# Altium PCB light_controller.PcbDoc
Units mil, origin at the board's own origin, x right, y up, seen from the top; angles counter-clockwise.
Board outline 1400 x 1400 mil, 4 copper layers (Top Layer, Int1 (GND), Int2 (PWR), Bottom Layer), stack 53.911 mil thick; 51 components, 34 nets, 142 pads, 43 vias.
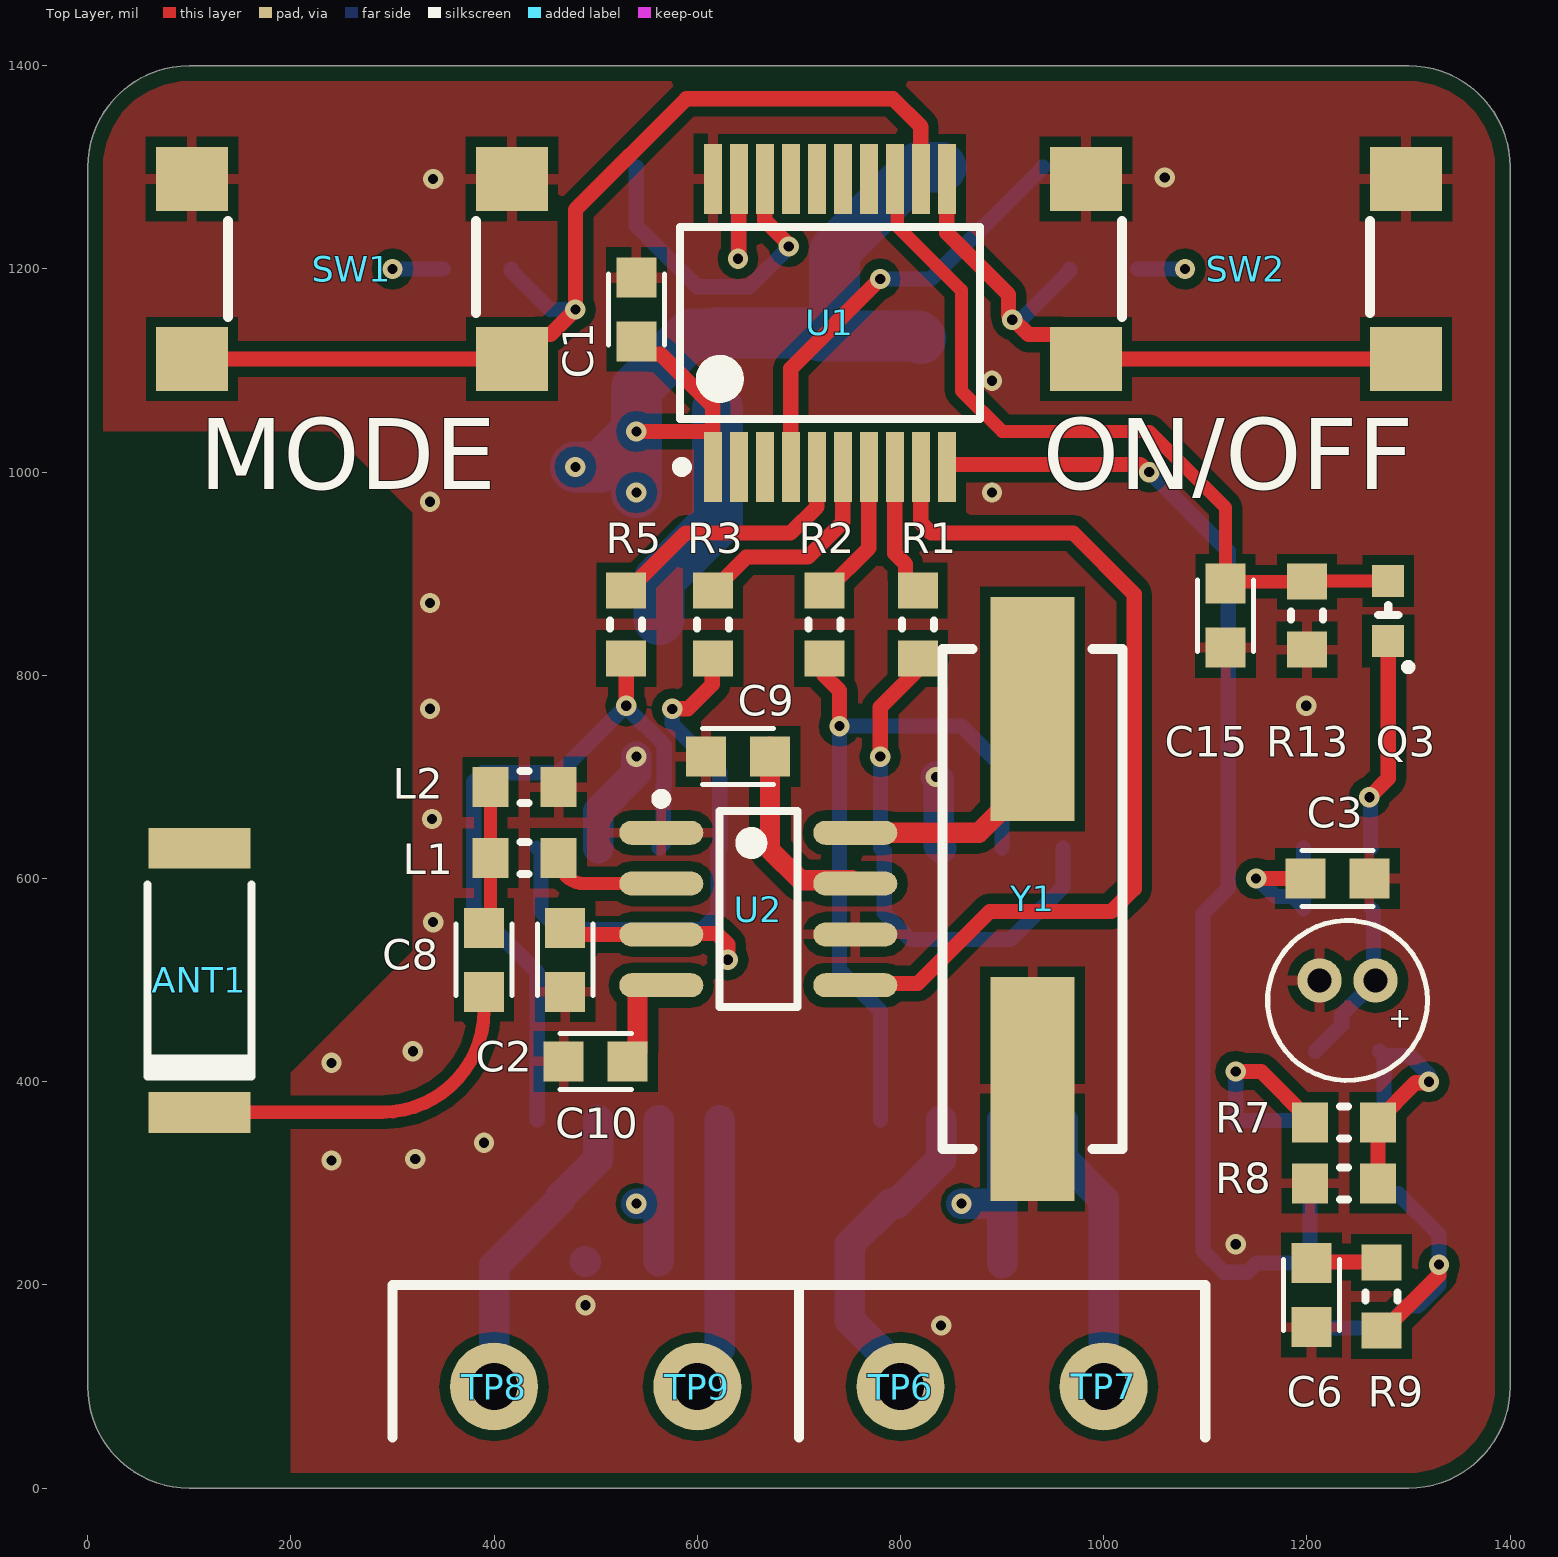
[diagram p0: Top Layer view]
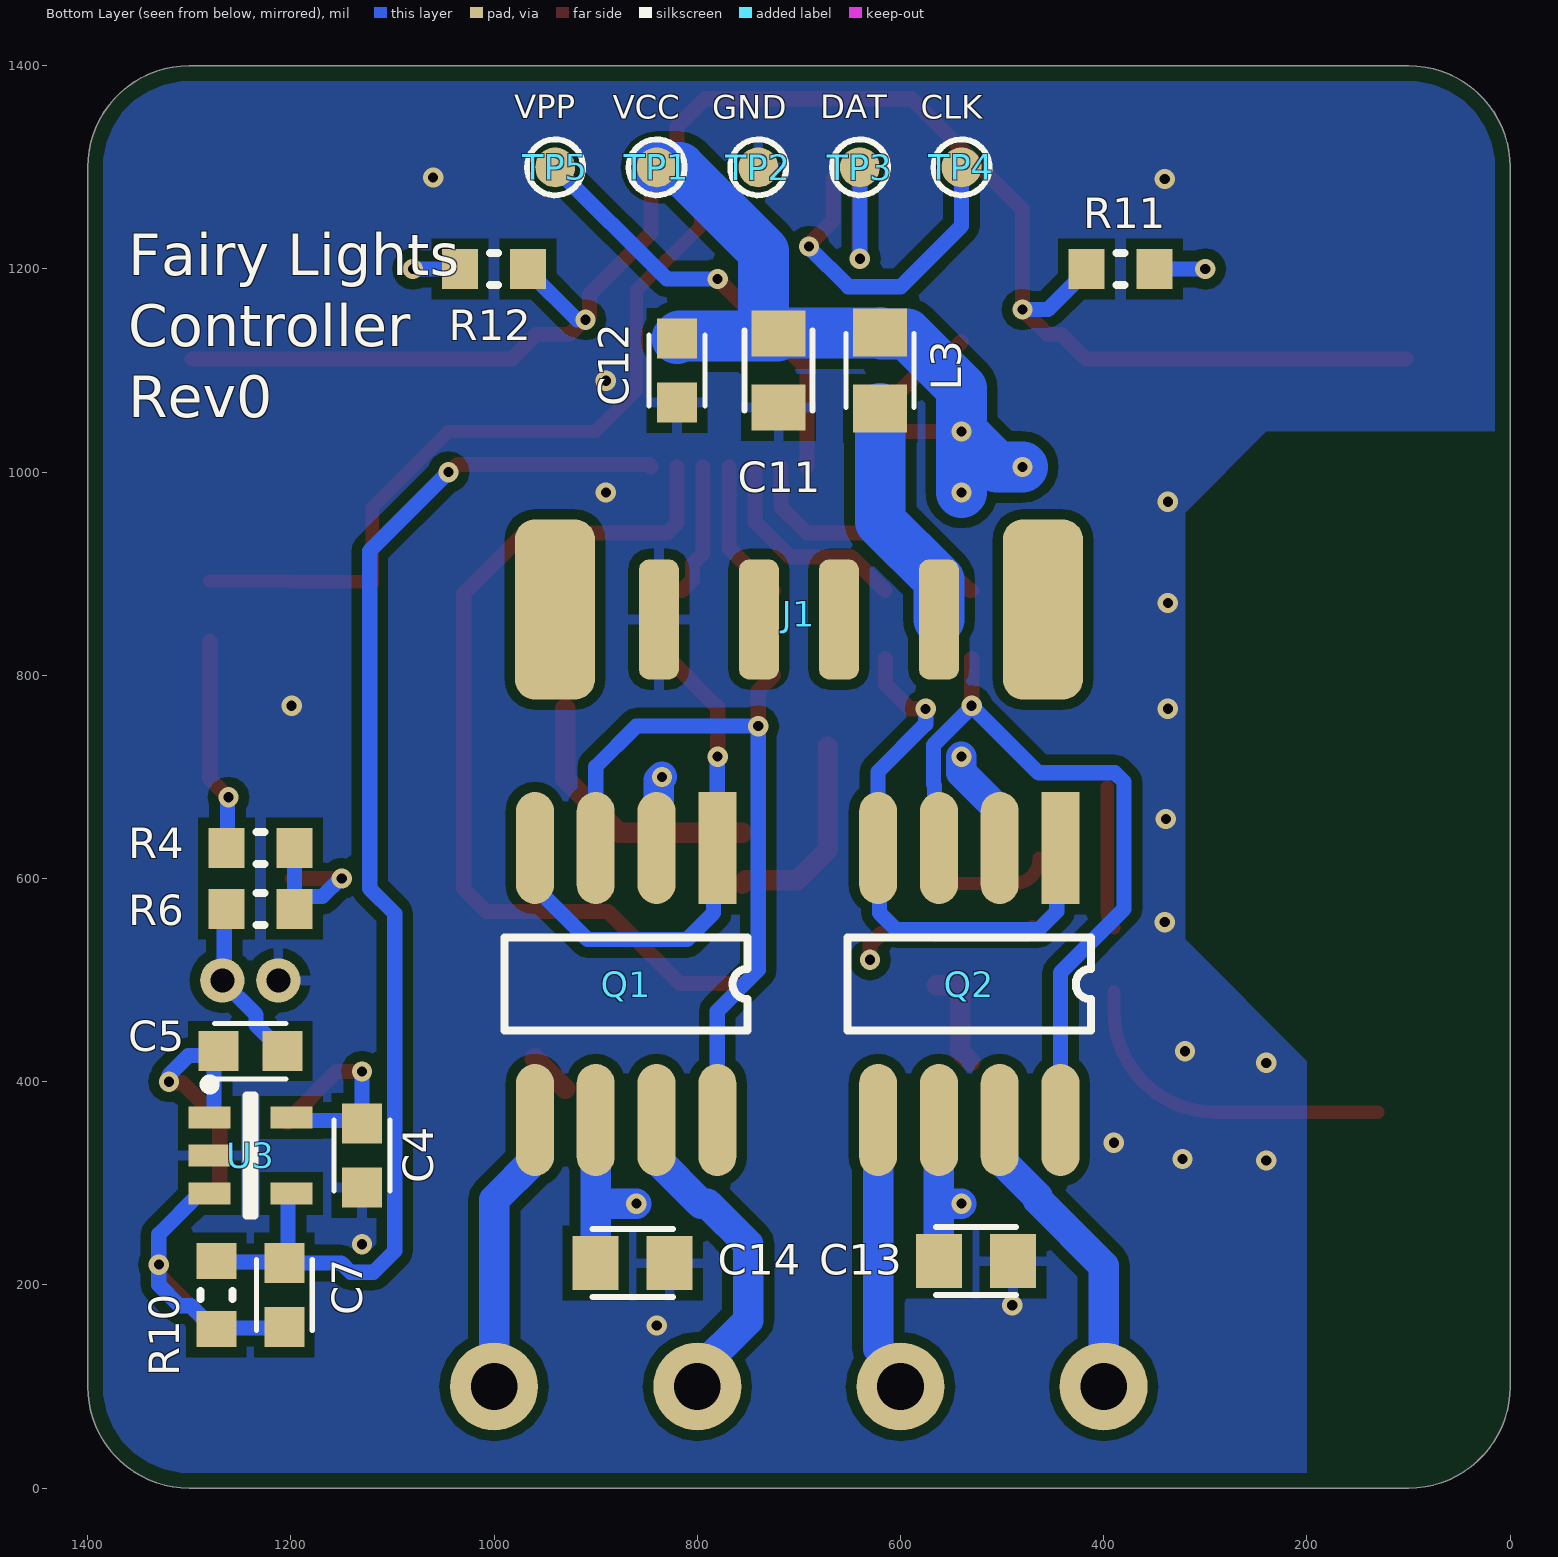
[diagram p1: Bottom Layer view, seen from below]
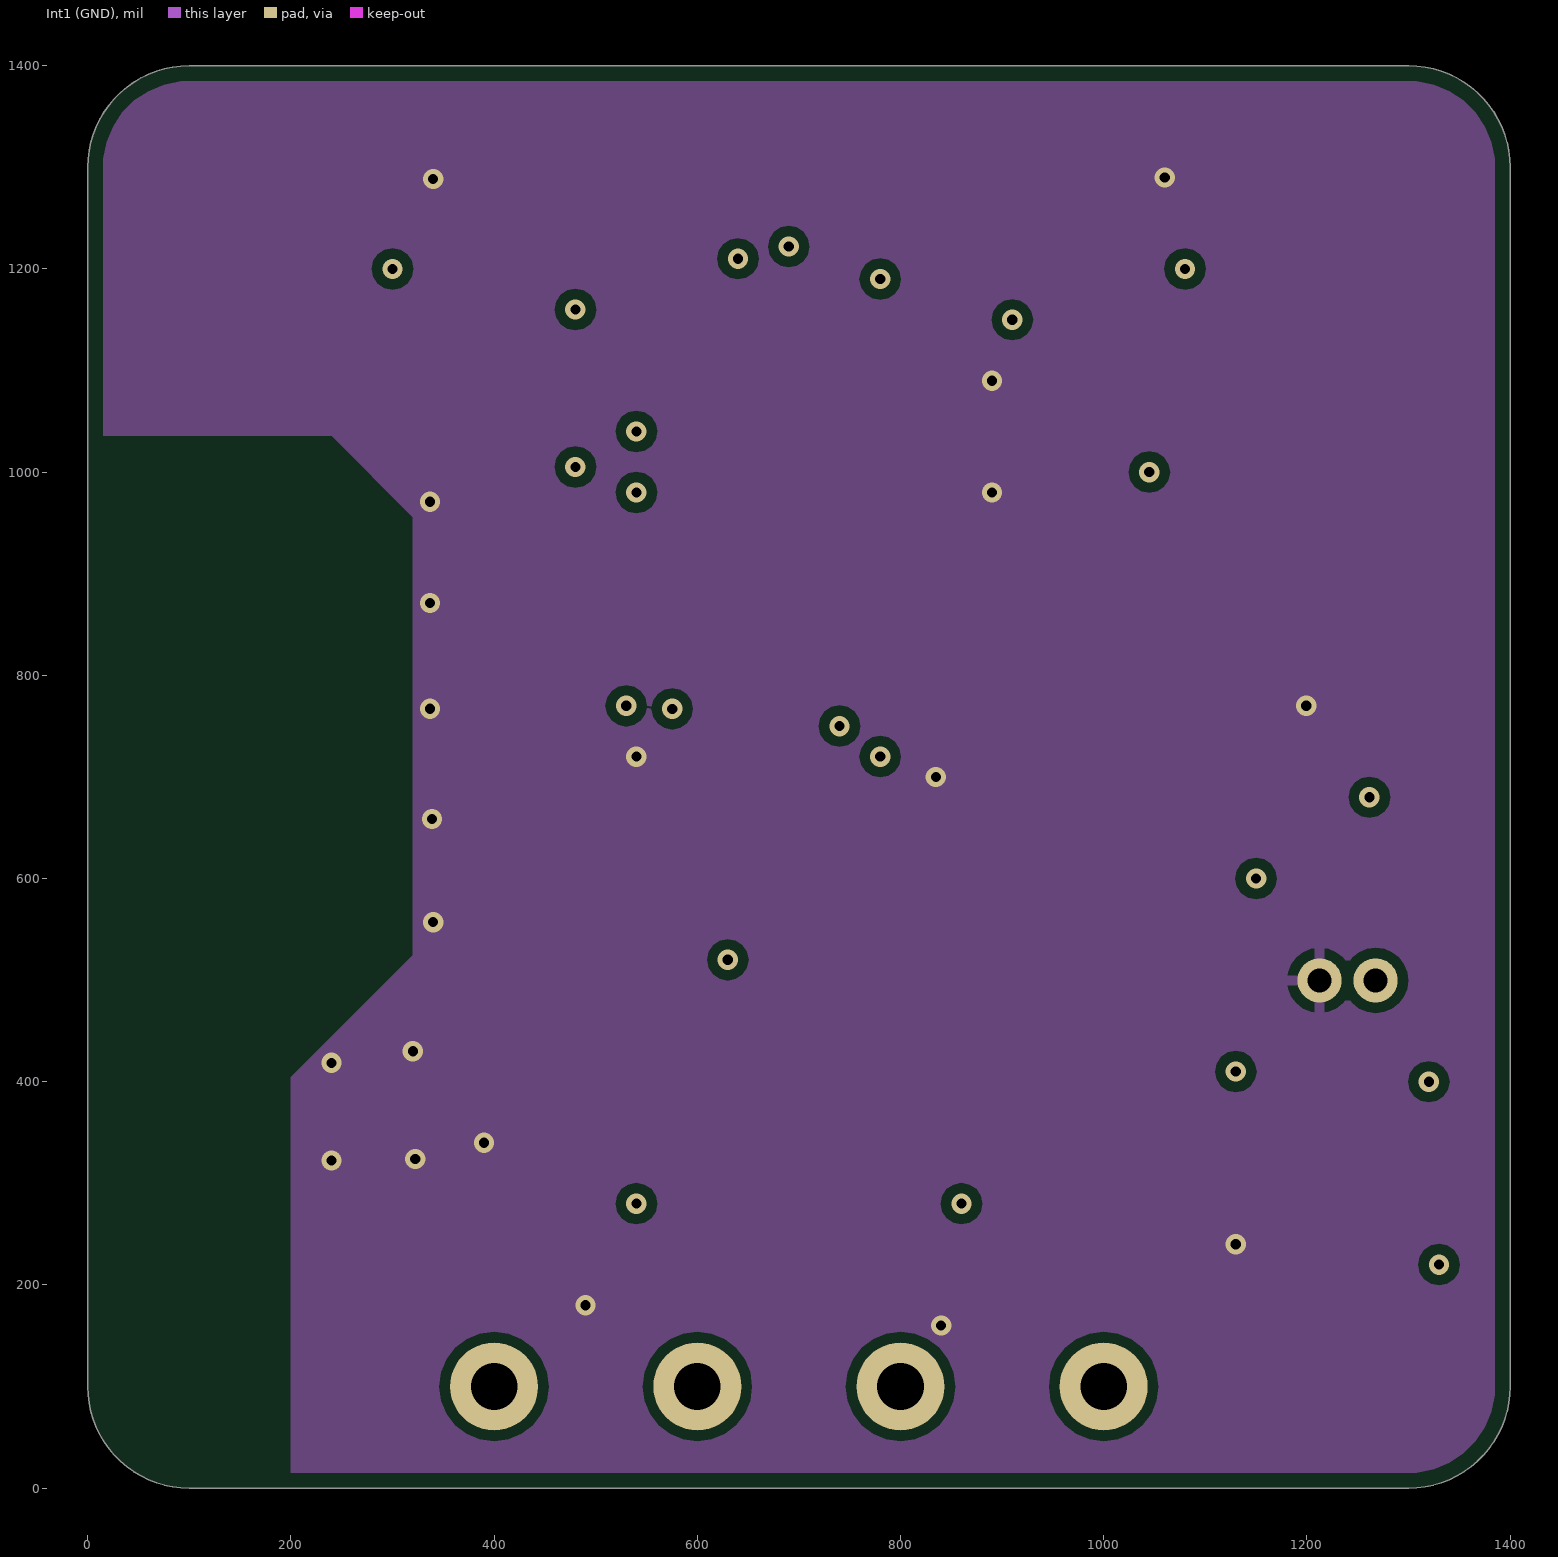
[diagram p2: Int1 (GND)]
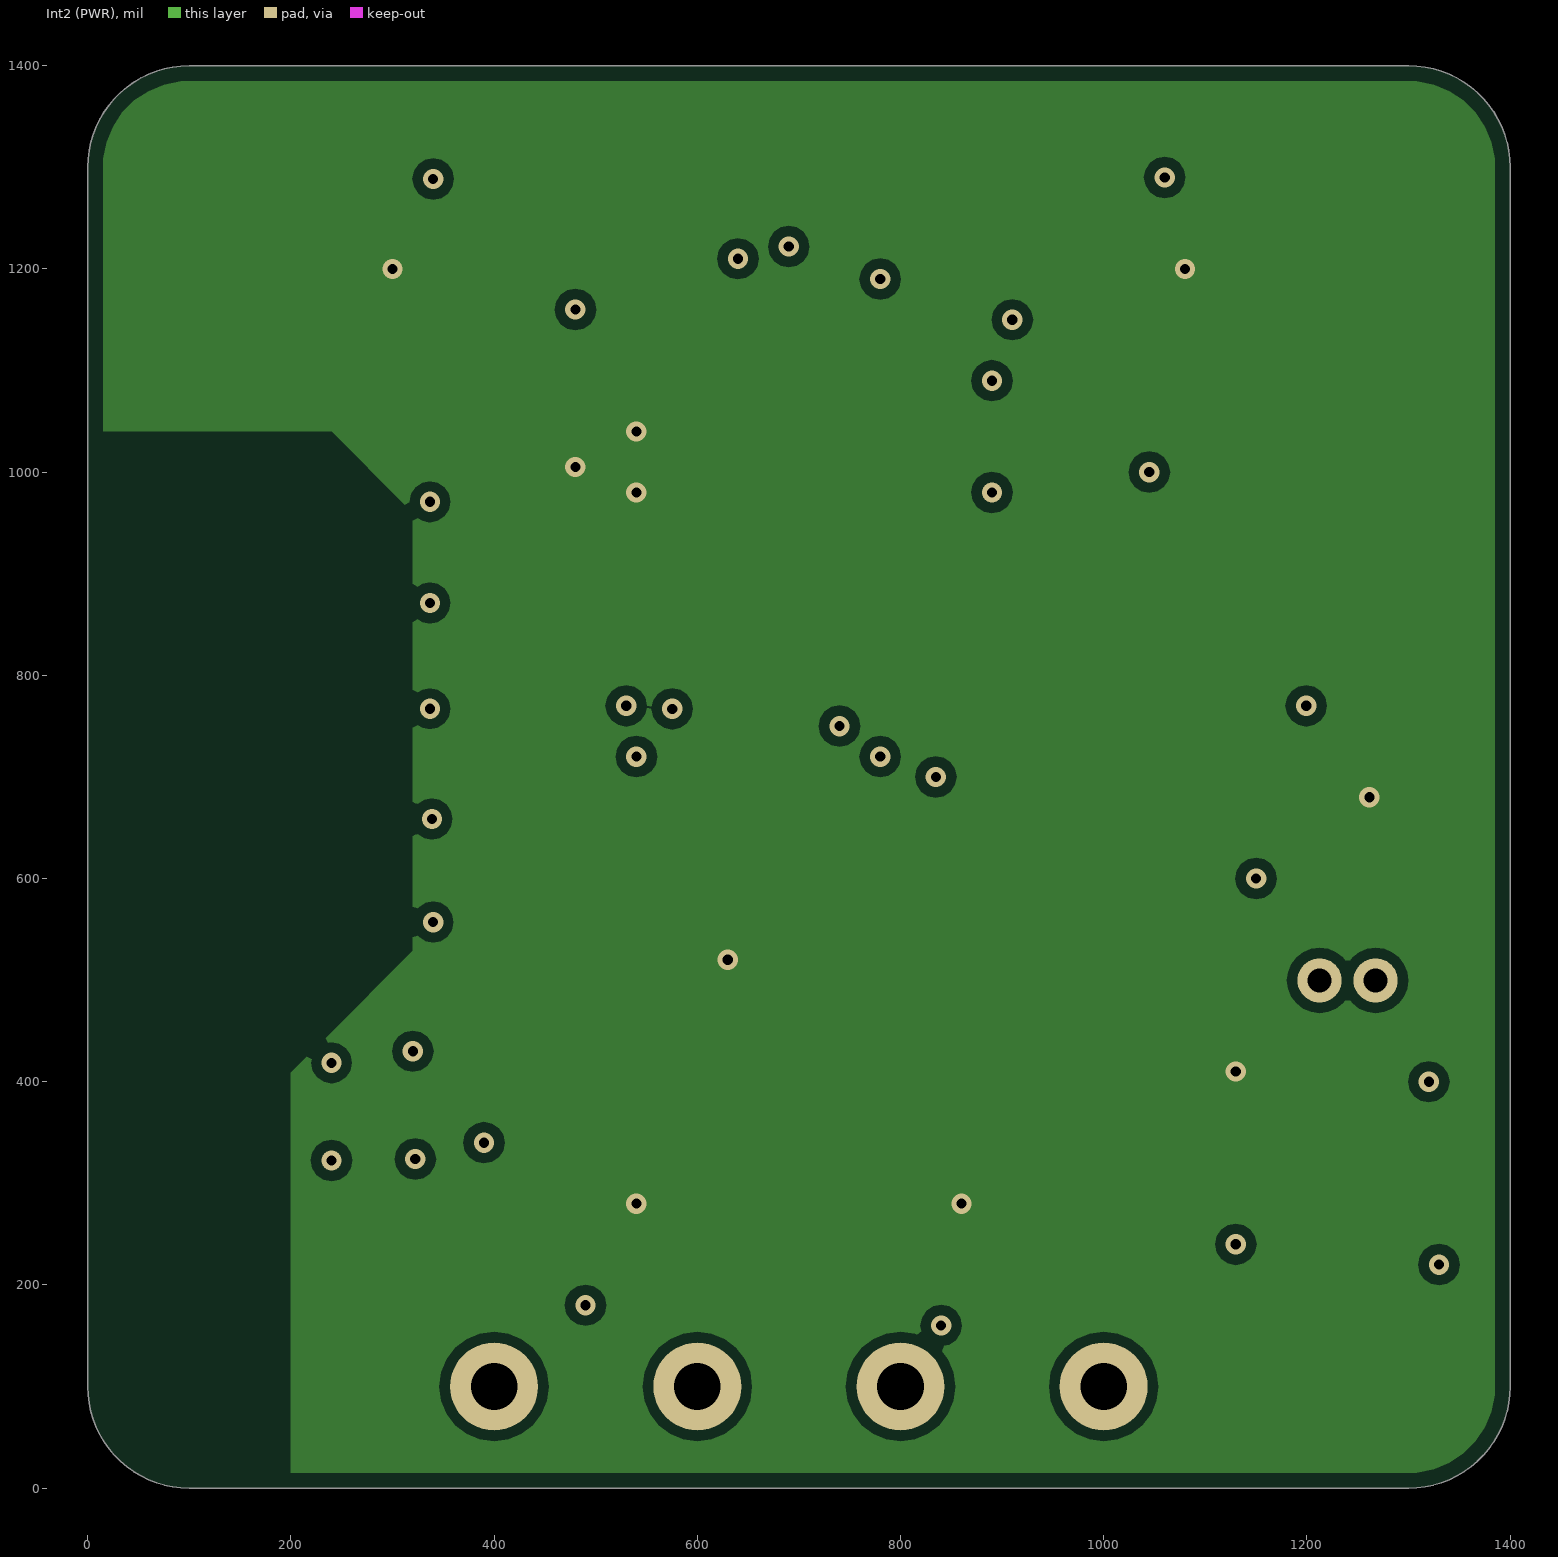
[diagram p3: Int2 (PWR)]
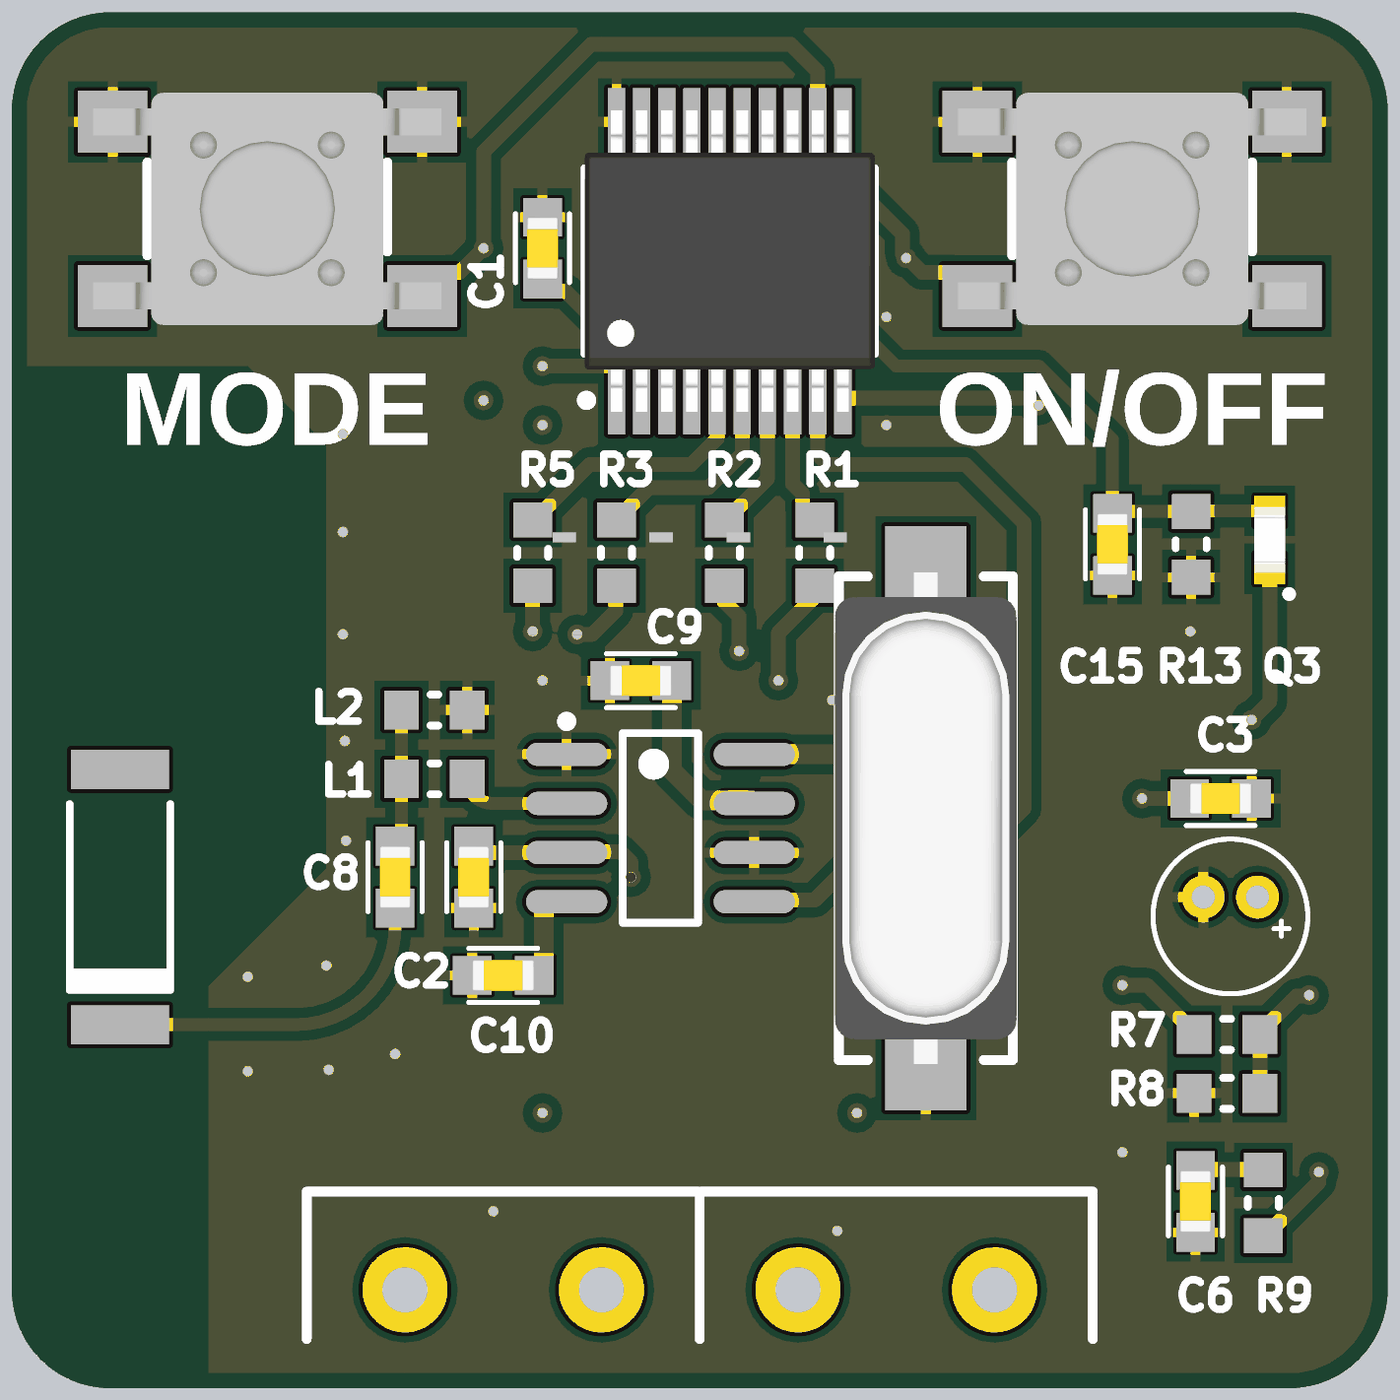
[diagram p4: 3D render of the assembled board from above, using the file's embedded part models]

## Layer stack, top to bottom
Top Solder: solder mask 1, SM-001, Dk 4
Top Layer: signal copper 1.3778
Dielectric 1: prepreg 5.1, PP-017, Dk 4.3
Dielectric 2: prepreg 5.1, PP-017, Dk 4.3
Int1 (GND): signal copper 1.3778
Dielectric 3: core 28, Core-039, Dk 4.8
Int2 (PWR): signal copper 1.3778
Dielectric 4: prepreg 5.1, PP-017, Dk 4.3
Dielectric 5: prepreg 5.1, PP-017, Dk 4.3
Bottom Layer: signal copper 1.3778
Bottom Solder: solder mask 1, SM-001, Dk 4

## Board outline
0,100 0,1300 cw(c100,1300) 100,1400 1300,1400 cw(c1300,1300) 1400,1300 1400,100 cw(c1300,100) 1300,0 100,0 cw(c100,100)

## Design rules (kind name [scope] priority, off if disabled: settings)
BoardOutlineClearance [All] p1: gap=15 ignorepadtopadclearanceinfootprint=FALSE
Clearance [All] p1: gap=10 ignorepadtopadclearanceinfootprint=FALSE except(0: Arc-Hole Track-Hole SMDPad-Hole THPad-Hole Via-Hole Fill-Hole Poly-Hole Region-Hole Text-Hole; 5: Arc-Arc Arc-Track Arc-SMDPad Track-Track Track-SMDPad SMDPad-SMDPad)
MinimumSolderMaskSliver [All] p1: minsoldermaskwidth=7
PolygonConnect PolygonConnect_Via [All vs isVia] p1: connectstyle=Direct reliefconductorwidth=10 reliefentries=4 polygonreliefangle="90 Angle" airgapwidth=10
PolygonConnect [All] p2: connectstyle=Relief reliefconductorwidth=10 reliefentries=4 polygonreliefangle="90 Angle" airgapwidth=10
RoutingVias [All] p1: holewidth=10 width=20 viastyle="Through Hole" minholewidth=10 minwidth=20 maxholewidth=28 maxwidth=50
SolderMaskExpansion [All] p1: expansion=4
Width [All] p1: maxlimit=100 minlimit=10 preferedwidth=10 midlayer1_maxwidth=10 midlayer2_maxwidth=10 minimp=50.000000 maximp=50.000000 favimp=50.000000
29 further rules are at their usual default settings.

## Components (designator, comment, footprint, x,y, rotation, side; value= is the part's Value field where it differs from the comment)
ANT1 "CHIP ANTENNA" ANT-2.4-CHP 110,499.68 r90 top
C1 "0.1uF" CAP_0603 540,1160 r90 top
C2 "0.1uF" CAP_0603 470,520 r270 top
C3 "0.1uF" CAP_0603 1230,600 r0 top
C4 "1uF" CAP_0603 1130,327.4 r90 bottom
C5 "10nF" CAP_0603 1240,430 r0 bottom
C6 "1uF" CAP_0603 1204.45,190 r90 top
C7 "100pF" CAP_0603 1206.54,190 r270 bottom
C8 "10pF" CAP_0603 390,520 r270 top
C9 "2.2uF" CAP_0603 640,720 r0 top
C10 "39nF" CAP_0603 500,420 r0 top
C11 "47uF" CAP_0805 720,1100 r270 bottom
C12 "0.1uF" CAP_0603 820,1100 r270 bottom
C13 "10uF" CAP_0805 525.79,223.46 r0 bottom
C14 "10uF" CAP_0805 863.58,221.5 r0 bottom
C15 "1uF" CAP_0603 1120,858.68 r90 top
J1 "USB-A" USB_VERT_PLUG 700,855 r180 bottom
L1 "33nH" RES_0603 430,620 r180 top
L2 "10nH" RES_0603 430,690 r180 top
L3 "1.5uH" RES_0805 620,1100 r90 bottom
Q1 "ZXMHC6A07T8TA" SOT-223-8 780.32,630 r270 bottom
Q2 "ZXMHC6A07T8TA" SOT-223-8 442.52,630 r270 bottom
Q3 "ALS-PT19-315C" LED_ALS-PT19 1433.55,863.21 r90 top
R1 "100" RES_0603 816.96,850 r270 top
R2 "100" RES_0603 724.96,850 r270 top
R3 "100" RES_0603 615.28,850 r270 top
R4 "2k" RES_0603 1230,630 r0 bottom
R5 "100" RES_0603 530,850 r270 top
R6 "2k" RES_0603 1230,570 r180 bottom
R7 "1M" RES_0603 1236.54,360 r180 top
R8 "1M" RES_0603 1236.54,300 r0 top
R9 "10k" RES_0603 1273.46,188.5 r270 top
R10 "100k" RES_0603 1273.46,190 r270 bottom
R11 "10k" RES_0603 383.46,1200 r180 bottom
R12 "10k" RES_0603 1000,1200 r0 bottom
R13 "1M" RES_0603 1200,858.68 r90 top
SW1 "PUSHBUTTON-SPST-4Term" SWITCH_TACTILE_6MM 260,1200 r180 top
SW2 "PUSHBUTTON-SPST-4Term" SWITCH_TACTILE_6MM 1140,1200 r180 top
TP1 "TESTPOINT" PAD_40MIL 840,1300 r270 bottom
TP2 "TESTPOINT" PAD_40MIL 740,1300 r180 bottom
TP3 "TESTPOINT" PAD_40MIL 640,1300 r180 bottom
TP4 "TESTPOINT" PAD_40MIL 540,1300 r180 bottom
TP5 "TESTPOINT" PAD_40MIL 940,1300 r180 bottom
TP6 "TESTPOINT" THROUGH_HOLE_20AWG 800,100 r0 top
TP7 "TESTPOINT" THROUGH_HOLE_20AWG 1000,100 r0 top
TP8 "TESTPOINT" THROUGH_HOLE_20AWG 400,100 r0 top
TP9 "TESTPOINT" THROUGH_HOLE_20AWG 600,100 r0 top
U1 "PIC16F18345-I/SS" MCHP-SS-20_V 730.43,1146.85 r90 top
U2 "MICRF022YM-FS48" SOIC127P600X175-8N 660,570 r0 top
U3 "MAX4465EX" SOT95P245X110-5N 1239.65,327.4 r180 bottom
Y1 "CRYSTAL" XTAL_ABLS 930,580 r270 top

## Footprints (in the part's own frame and the unit in brackets; to place one, negate y for a bottom-side part, rotate by r counter-clockwise, add the part's x,y. Pads: shape width x height; smd on the part's side, far side on the other; paste and mask are expansions set on the pad)
ANT-2.4-CHP [mil]
  rect 40x100 smd: 1(-130,0) 2(130,0)
  silkscreen extent -94,-51 94,51, body extent -130,-45 130,45, height 40
CAP_0603 [mm]
  rect 1x1 smd mask+0.076: 1(-0.8,0) 2(0.8,0)
  silkscreen extent -0.89,-0.7 0.89,0.7, body extent -0.8,-0.4 0.8,0.4, height 0.86
CAP_0805 [mm] "Chip Capacitor, 2-Leads, Body 2.00x0.94mm, IPC Medium Density"
  rect 1.15x1.35 smd: 1(-0.925,0) 2(0.925,0)
  silkscreen extent -1,-0.85 1,0.85, body extent -1.07,-0.66 1.08,0.66, height 0.65
LED_ALS-PT19 [mm] "LED / Phototransistor Footprint"
  rect 0.8x0.8 smd paste-4 mask+0.076: 1(-0.75,3.9) 2(0.75,3.9)
  silkscreen extent -1.48,3.32 0.15,4.15, body extent -0.85,3.5 0.85,4.3, height 0.56
MCHP-SS-20_V [mm] "SOP, 20-Leads, Body 7.50x5.60mm, Pitch 0.65mm"
  rect 1.75x0.45 smd: 1(-3.6,2.925) 2(-3.6,2.275) 3(-3.6,1.625) 4(-3.6,0.975) 5(-3.6,0.325) 6(-3.6,-0.325) 7(-3.6,-0.975) 8(-3.6,-1.625) 9(-3.6,-2.275) 10(-3.6,-2.925) 11(3.6,-2.925) 12(3.6,-2.275) 13(3.6,-1.625) 14(3.6,-0.975) 15(3.6,-0.325) 16(3.6,0.325) 17(3.6,0.975) 18(3.6,1.625) 19(3.6,2.275) 20(3.6,2.925)
  silkscreen extent -3.72,-3.75 2.4,3.82, body extent -3.9,-3.75 3.9,3.75, height 2
PAD_40MIL [mm]
  round 1 smd paste-4 mask+0.076: 1(0,0)
  silkscreen extent -0.7,-0.7 0.7,0.7
RES_0603 [mm] "Chip Resistor, 2-Leads, Body 1.60x0.82mm, IPC Medium Density"
  rect 0.9x1 smd: 1(-0.85,0) 2(0.85,0)
  silkscreen extent -0.1,-0.4 0.1,0.4, body extent -0.85,-0.48 0.85,0.47, height 0.6
RES_0805 [mm]
  rect 1.2x1.35 smd mask+0.076: 1(-0.95,0) 2(0.95,0)
  silkscreen extent -0.92,-0.85 0.92,0.85, body extent -1,-0.62 1,0.63, height 0.58
SOIC127P600X175-8N [mm]
  oval 2.1x0.6 smd: 1(-2.425,1.905) 2(-2.425,0.635) 3(-2.425,-0.635) 4(-2.425,-1.905) 5(2.425,-1.905) 6(2.425,-0.635) 7(2.425,0.635) 8(2.425,1.905)
  silkscreen extent -2.55,-2.45 0.98,2.88, body extent -1.95,-2.45 1.95,2.45, height 1.75
SOT95P245X110-5N [mm]
  rect 1.05x0.55 smd: 1(-1.025,0.95) 2(-1.025,0) 3(-1.025,-0.95) 4(1.025,-0.95) 5(1.025,0.95)
  silkscreen extent -1.15,-1.5 0.1,1.9, body extent -0.7,-1.5 0.7,1.5, height 1.1
SOT-223-8 [mm]
  rect 2.8x0.95 smd: 1(0,0)
  oval 2.8x0.95 smd: 2(0,-1.52) 3(0,-3.04) 4(0,-4.56) 5(6.8,-4.56) 6(6.8,-3.04) 7(6.8,-1.52) 8(6.8,0)
  silkscreen extent 2.23,-5.32 4.56,0.76, body extent -0.1,-5.55 6.9,0.95, height 1.8
SWITCH_TACTILE_6MM [mm] "Switch, Pushbutton, Tactile, 6mm, Surface Mount"
  rect 1.8x1.6 smd: 1(-4,2.25) 2(4,2.25) 3(-4,-2.25) 4(4,-2.25)
  silkscreen extent -3.1,-1.2 3.1,1.2, body extent -4.5,-3 4.5,3, height 5
THROUGH_HOLE_20AWG [mm] "20AWG clearance hole"
  round 2.2 hole 1.168: 1(0,0)
USB_VERT_PLUG [mm] "USB TYPE-A PLUG, VERTICAL MOUNT"
  rrect50% 1x3 smd: 1(3.5,0) 2(1,0) 3(-1,0) 4(-3.5,0)
  rrect50% 2x4.5 smd: ""(-6.1,0.25) ""(6.1,0.25)
  body extent -6.02,-2.25 6.02,2.25, height 18.76
XTAL_ABLS [mm] "Crystal, Abracon ABSL series"
  rect 5.6x2.1 smd: 1(-4.75,0) 2(4.75,0)
  silkscreen extent -6.25,-2.25 6.25,2.25, body extent -6.35,-2.35 6.35,2.35, height 4.06

## Part data
ANT1: "Two terminal chip antenna"
C1 C2 C3 C4 C5 C6 C7 C8 C9 C10 C11 C12 C13 C14 C15: "Capacitor"
  C3: Capacitance=0.1uF
  C4 C6 C15: Capacitance=1uF
  C5: Capacitance=10nF
  C7: Capacitance=100pF
  C8: Capacitance=10pF
  C9: Capacitance=2.2uF
  C10: Capacitance=39nF
  C11: Capacitance=47uF
  C13 C14: Capacitance=10uF
L1 L2 L3: library part INDUCTOR
  L1: Inductance=33nH
  L2: Inductance=10nH
  L3: Inductance=1.5uH
Q1 Q2: library part "H-BRIDGE MOSFET ARRAY", "Mosfet Array 2 N and 2 P-Channel (H-Bridge) 60V 1.6A, 1.3A 1.3W Surface Mount SM8"
Q3: library part PHOTOTRANSISTOR
R1 R2 R3 R4 R5 R6 R7 R8 R9 R10 R11 R12 R13: "Resistor"
  R1 R2 R3 R5: Resistance=100
  R4 R6: Resistance=2k
  R7 R8 R13: Resistance=1M
  R9 R11 R12: Resistance=10k
  R10: Resistance=100k
SW1 SW2: "SPST pushbutton - four terminal"
TP1 TP2 TP3 TP4 TP5 TP6 TP7 TP8 TP9: "Test Point", Part Number="TestPoint SMT 40mil"
U1: library part CMP-2000-06894-1, "Full-Featured, Low Pin Count Microcontrollers with XLP, 8 Bit, 14 KB, 1024 RAM, 1.8 to 5.5 V, -40 to 85 degC, 20-Pin SSOP (SS), RoHS, Tube", Manufacturer=Microchip-Technology, Operating Temperature=-40°C~85°C(TA), Package Description="20-Pin Shrink Small Outline Package Integrated Circuit, Body 7.2 x 5.3 mm, Pitch 0.65 mm", Package Reference=SS-20, Supplier Device Package=20-SSOP, Voltage - Supply (Vcc/Vdd)=2.3V~5.5V, Category=IntegratedCircuits(ICs), Connectivity=I²C,LIN,SPI,UART/USART, Core Processor=PIC, Core Size=8-Bit, Data Converters=A/D17x10b,D/A1x5b, Datasheet URL=http://ww1.microchip.com/downloads/en/DeviceDoc/40001795C.pdf, Datasheet Version="Rev. C, 10/2016", EEPROM Size=256x8, Family=Embedded-Microcontrollers, Manufacturer URL=http://www.microchip.com/, Mounting Technology=SurfaceMount, Number of I/O=18, Oscillator Type=Internal, Package URL=http://ww1.microchip.com/downloads/en/PackagingSpec/00000049CE.pdf, Packaging=Tube, Peripherals=Brown-outDetect/Reset,POR,PWM,WDT, Program Memory Size=14KB(8Kx14), Program Memory Type=FLASH, RAM Size=1Kx8, Series=PIC®XLP™16F, Speed=32MHz
U2: "- RF Receiver ASK, OOK 300MHz ~ 440MHz -97dBm 10 kbps PCB, Surface Mount 8-SOIC"
U3: library part MAX4466, "Amplifier IC 1-Channel (Mono) Class AB SC-70-5"
Y1: Frequency=6.7458MHz, ComponentLink1Description="Manufacturer URL", ComponentLink1URL=http://www.abracon.com/, ComponentLink2Description=Datasheet, ComponentLink2URL=http://www.abracon.com/Resonators/ABLS2.pdf

## Free pads (board coordinates)
  round 43.62 hole 23.62: M(1212.44,499.68) P(1267.56,499.68)

## Via types
v1: diameter 20, hole 10, Top Layer to Bottom Layer, tented both sides, 43 vias

## Nets (pads, with @x,y where several pads share a name; then routed paths per layer and width w, separated by ;. In a path a pad name is that pad's centre, name@x,y a point inside that pad or via, vN(x,y) a via of type N, cw(c..) or ccw(c..) an arc to the next point about the centre after c; other vN are vias at no path point)
5v0: C1.1 C2.1 C4.2 C11.1 C12.1 C13.2 C14.2 L3.2 Q1.6 Q2.6 Q3.1 R4.2 R7.2 R11.2 R12.2 TP1.1 U1.1 U2.3 U3.5 | length 1996.4
  Top Layer w15: C2.1 476.5,545 U2.3 565.44,545.91 619.09,545.91 630,535 v1(630,520) ; v1(540,1040) 615.28,1040 ; C1.1 552.19,1116.32 563.68,1116.32 615.28,1064.72 615.28,1040 ; U1.1 615.28,1040 ; v1(1130,410) 1155.04,410 1203.07,361.97 R7.2 ; v1(1261.5,680) 1280,698.5 Q3.1
  Bottom Layer w15: v1(300,1200) R11.2 ; R12.2 v1(1080,1200) ; v1(1130,410) C4.2 1132.95,361.85 1196.34,361.85 U3.5 ; v1(1261.5,680) 1262.45,679.04 1262.45,631.01 R4.2
  Bottom Layer w30: v1(540,280) 562.2,280.04 ; C13.2 562.2,280.04 ; Q2.6 562.2,280.04 ; v1(860,280) 900,280 ; C14.2 900,280 ; Q1.6 900,280
  Bottom Layer w50: v1(480,1005.12) 505.12,1005.12 v1(540,1040) ; v1(540,980) v1(540,1040) ; C12.1 817.44,1134.06 721.57,1134.06 720,1135.63 C11.1 ; TP1.1 817.63,1300 735,1217.37 735,1151.42 C11.1 ; v1(540,1040) 540,1082.29 593.73,1136.02 618.62,1136.02 L3.2 620.49,1136.91 719.51,1136.91 C11.1
BTTN1: R11.1 SW1.1 SW1.2 U1.12 | length 1024.8
  Top Layer w15: SW1.2 SW1.1 441.48,1135.41 455.41,1135.41 v1(480,1160) 480,1258.34 589.16,1367.5 792.5,1367.5 820,1340 U1.12
  Bottom Layer w15: R11.1 416.93,1198.03 454.96,1160 v1(480,1160)
BTTN2: R12.1 SW2.1 SW2.2 U1.11 | length 647.1
  Top Layer w15: U1.11 845.59,1235.4 906.2,1174.78 906.2,1153.8 v1(910,1150) 911.35,1150 925.94,1135.41 958.52,1135.41 SW2.2 SW2.1
  Bottom Layer w15: v1(910,1150) 918.5,1150 966.54,1198.03 R12.1
CLK: TP4.1 U1.18 | length 325.7
  Top Layer w15: U1.18 666.46,1247.54 690,1223.99 v1(690,1222)
  Bottom Layer w15: TP4.1 540,1242.2 599.7,1182.5 651.39,1182.5 690,1221.11 v1(690,1222)
DAT: TP3.1 U1.19 | length 168.9
  Top Layer w15: v1(640,1210) 640.87,1210.87 U1.19
  Bottom Layer w15: v1(640,1210) TP3.1
GND: C1.2 C2.2 C3.2 C4.1 C6.1 C9.1 C10.1 C11.2 C12.2 C13.1 C14.1 C15.1 J1.4 L2.1 pad.M Q1.2 Q2.2 R8.1 R13.1 SW1.3 SW1.4 SW2.3 SW2.4 TP2.1 U1.20 U2.1 U2.6 U3.2 Y1.2 | length 221.1
  Top Layer w20: Y1.2 Y1.2@960,422.99
  Bottom Layer w30: C13.1 C13.1@490,222.83 ; Q2.2 502.36,666.42 540,704.06 v1(540,720) ; v1(834.76,700) 837.8,696.97 837.8,632.36 Q1.2
  other v1: 840,160 490,180 1130,240 240,322.5 322.43,323.91 390,340 240,418.59 320,430 340,557.12 338.84,658.59 336.85,767.1 1199.29,770 336.85,871.2 336.85,970.79 890,980 890,1090 340,1288.58 1060,1290
LED0: Q1.5 TP7.1 | length 278.9
  Bottom Layer w30: Q1.5 959.84,323.86 1000,283.71 TP7.1
LED1: Q1.7 TP6.1 | length 324
  Bottom Layer w30: TP6.1 800,115.32 750,165.32 750,240 790.04,280.04 796.29,280.04 840.16,323.91 Q1.7
LED2: Q2.5 TP9.1 | length 271.4
  Bottom Layer w30: TP9.1 600,115.32 622.05,137.37 Q2.5
LED3: Q2.7 TP8.1 | length 304.7
  Bottom Layer w30: TP8.1 400,218.66 465.04,283.71 465.04,286.54 502.36,323.86 Q2.7
LED_DRIVE0: R1.1 U1.8 | length 132.1
  Top Layer w15: U1.8 794.41,920 804.78,909.63 804.78,893.68 815,883.46 R1.1
LED_DRIVE1: R2.1 U1.7 | length 141
  Top Layer w15: R2.1 726.93,883.46 768.82,925.35 U1.7
LED_DRIVE2: R3.1 U1.6 | length 210.1
  Top Layer w15: R3.1 648.27,916.46 708.75,916.46 743.23,950.94 U1.6
LED_DRIVE3: R5.1 U1.5 | length 261
  Top Layer w15: R5.1 531.97,883.46 588.5,940 691.78,940 717.64,965.86 U1.5
LIGHT_DET: C15.2 Q3.2 R13.2 U1.13 | length 779.9
  Top Layer w13: U1.13 796.77,1286.22 796.77,1242.22 860,1178.99 860,1080 900,1040 1044.88,1040 1120,964.88 C15.2 cw(c1121.97,890.18) 1121.97,892.15 R13.2 1200,892.74 Q3.2
MIC_OUT: C7.1 R10.1 U1.10 U3.4 | length 1273.5
  Top Layer w15: U1.10 845.59,1006.14 846.95,1007.5 1036.03,1007.5 1043.53,1000 v1(1044.88,1000)
  Bottom Layer w15: v1(1044.88,1000) 1122.5,922.38 1122.5,590.18 1097.81,565.5 1097.81,233.29 1118.61,212.5 1141.39,212.5 1150.39,221.5 C7.1 ; U3.4 1199.59,290 1202.91,286.67 1202.91,225.12 C7.1 ; R10.1 1272.48,222.48 1207.52,222.48 C7.1
NetANT1_1: ANT1.1 C8.2 | length 335.6
  Top Layer w13: ANT1.1@130,370 290,370 ccw(c290,470) 390,470 C8.2
NetC3_1: C3.1 R4.1 R6.2 | length 166.7
  Top Layer w15: v1(1150,600) C3.1
  Bottom Layer w15: v1(1150,600) 1151.35,600 1169.17,582.19 1186.32,582.19 R6.2@1196.54,571.97 ; R6.2 R6.2@1196.54,571.97 ; R4.1 R6.2@1196.54,571.97
NetC5_1: C5.1 pad.P R6.1 | length 166.2
  Bottom Layer w15: C5.1 1234.31,455.81 1234.31,465.96 1267.56,499.21 pad.P 1265.51,501.73 1265.51,567.95 R6.1
NetC5_2: C5.2 R7.1 R8.2 U3.1 | length 255.8
  Top Layer w15: R8.2 R7.1 1270,361.97 1307.07,399.04 1319.04,399.04 v1(1320,400)
  Bottom Layer w15: C5.2 C5.2@1275.75,425.75 ; U3.1 1279.07,364.8 1275.75,368.13 C5.2@1275.75,425.75 ; v1(1320,400) 1320,406.73 1300.98,425.75 C5.2@1275.75,425.75
NetC6_2: C6.2 R9.1 | length 70.8
  Top Layer w15: C6.2@1203.46,223.46 1204.45,222.48 1272.48,222.48 R9.1@1273.46,221.5
NetC7_2: C7.2 R9.2 R10.2 U3.3 | length 348.3
  Top Layer w15: R9.2 1275.43,155.04 1330,209.61 v1(1330,220)
  Bottom Layer w15: C7.2 1207.52,157.52 1272.48,157.52 R10.2 1275.43,156.54 1298.29,179.39 1309.39,179.39 1330,200 v1(1330,220) 1330,249.84 1289.84,290 U3.3
NetC8_1: C8.1 L1.2 L2.2 | length 140.3
  Top Layer w13: C8.1 ccw(c374.22,567.27) 396.54,567.27 L1.2 L2.2
NetC9_2: C9.2 U2.7 | length 199.4
  Top Layer w20: C9.2@671.5,730 671.5,628.5 701.81,598.19 752.28,598.19 U2.7
NetC10_2: C10.2 U2.4 | length 101.4
  Top Layer w20: C10.2 541.18,429.69 541.18,493.33 542.85,495 U2.4
NetJ1_1: J1.1 L3.1 | length 231.5
  Bottom Layer w50: J1.1 562.2,893.74 620,951.54 L3.1
NetL1_1: L1.1 U2.2 | length 115.3
  Top Layer w13: L1.1 ccw(c488.46,620) 488.46,595 U2.2
NetQ1_1: Q1.1 Q1.4 R1.2 | length 520.4
  Top Layer w15: v1(780,720) 780,768.5 828.03,816.54 R1.2@830,816.54
  Bottom Layer w15: v1(780,720) 780.32,719.68 Q1.1 784.02,626.3 784.02,565.98 810,540 908.22,540 959.84,591.62 Q1.4
NetQ1_3: Q1.3 Q1.8 R2.2 | length 717.2
  Top Layer w15: R2.2@724.96,800 740,784.96 v1(740,750)
  Bottom Layer w15: Q1.8 780.32,469.68 740,510 v1(740,750) 860,750 900,710 Q1.3
NetQ2_1: Q2.1 Q2.4 R3.2 | length 548.4
  Top Layer w15: v1(575.28,767.01) 590.55,767.01 614.7,791.17 614.7,815.96 R3.2
  Bottom Layer w15: Q2.1 446.22,626.3 446.22,567.57 463.91,549.88 604.47,549.88 620.63,566.04 620.63,628.58 Q2.4 622.05,705.13 575.28,751.9 v1(575.28,767.01)
NetQ2_3: Q2.3 Q2.8 R5.2 | length 744.1
  Top Layer w15: v1(530,770) R5.2
  Bottom Layer w15: Q2.8 442.52,507.36 380,569.88 380,695.27 388.79,704.06 464.06,704.06 v1(530,770) 530,768.89 567.5,731.39 567.5,692.66 566.49,691.66 566.49,634.29 Q2.3
NetU2_8: U2.8 Y1.1 | length 265.4
  Top Layer w20: U2.8 876.89,645 930,698.11 Y1.1
REMOTE: U1.9 U2.5 | length 898
  Top Layer w15: U2.5 757.12,496.65 816.96,496.65 887.82,567.5 1007.5,567.5 1030,590 1030,880 970,940 830,940 820,950 U1.9
VPP: TP5.1 U1.4 | length 426.9
  Top Layer w15: U1.4 692.05,1102.05 v1(780,1190)
  Bottom Layer w15: v1(780,1190) 830,1190 TP5.1
pads on no net: ANT1.2 J1. J1.2 J1.3 U1.2 U1.3 U1.14 U1.15 U1.16 U1.17

## Polygon pours and split planes (outlines as drawn)
GND on Top Layer "Top Layer-GND" (solid, pour order 0): 0,1395.76 1400,1395.76 1400,-4.23 0,-4.24
GND on Bottom Layer "Bottom Layer GND" (solid, pour order 2): 0,1400 1400,1400 1400,0 0,0
5v0 on Int2 (PWR) (solid, pour order 8): 0,1400 1400,1400 1400,0 0,0
GND on Int1 (GND) (solid, pour order 10): 0,1400 1400,1400 1400,0 0,0

## Other copper
Top Layer:
  pour cut-out: 200,0 200,408.79 320,528.79 320,960 240,1040 0,1040 0,0
Int1 (GND):
  pour cut-out: 200,-4.39 200,404.39 320,524.39 320,955.61 240,1035.61 0,1035.61 0,-4.39
Int2 (PWR):
  pour cut-out: 200,0 200,408.79 320,528.79 320,960 240,1040 0,1040 0,0
Bottom Layer:
  pour cut-out: 200,0 200,420 320,540 320,960 240,1040 0,1040 0,0

## Silkscreen, mask and mechanical layers (free items; w line width, h text height)
Top Overlay:
  circle w5: c1240,480 r78.74
  lines w10: 300,50 300,200 1100,200 1100,50 ; 700,50 700,200
  text "MODE" at 110,960 h120
  text "ON/OFF" at 940,960 h120
  text "+" at 1300,450 h20 r90
Bottom Overlay:
  text "CLK" at 580,1340 h40
  text "DAT" at 678.93,1340.44 h40
  text "GND" at 785.14,1340 h40
  text "VCC" at 883.27,1340 h40
  text "VPP" at 980,1340.44 h40
  text "Fairy Lights / Controller / Rev0" at 1360,1040 h70
Mechanical 4:
  circle w5: c1240,480 r78.74
  circle w5: c1240,480 r78.74
Mechanical 16:
  the board outline again, w10